# Altium PCB PCB2.PcbDoc
Units mm, origin at the board's own origin, x right, y up, seen from the top; angles counter-clockwise.
Board outline 152.4 x 101.6 mm, 2 copper layers (Top Layer, Bottom Layer); 5 components, 64 nets, 128 pads, 0 vias.
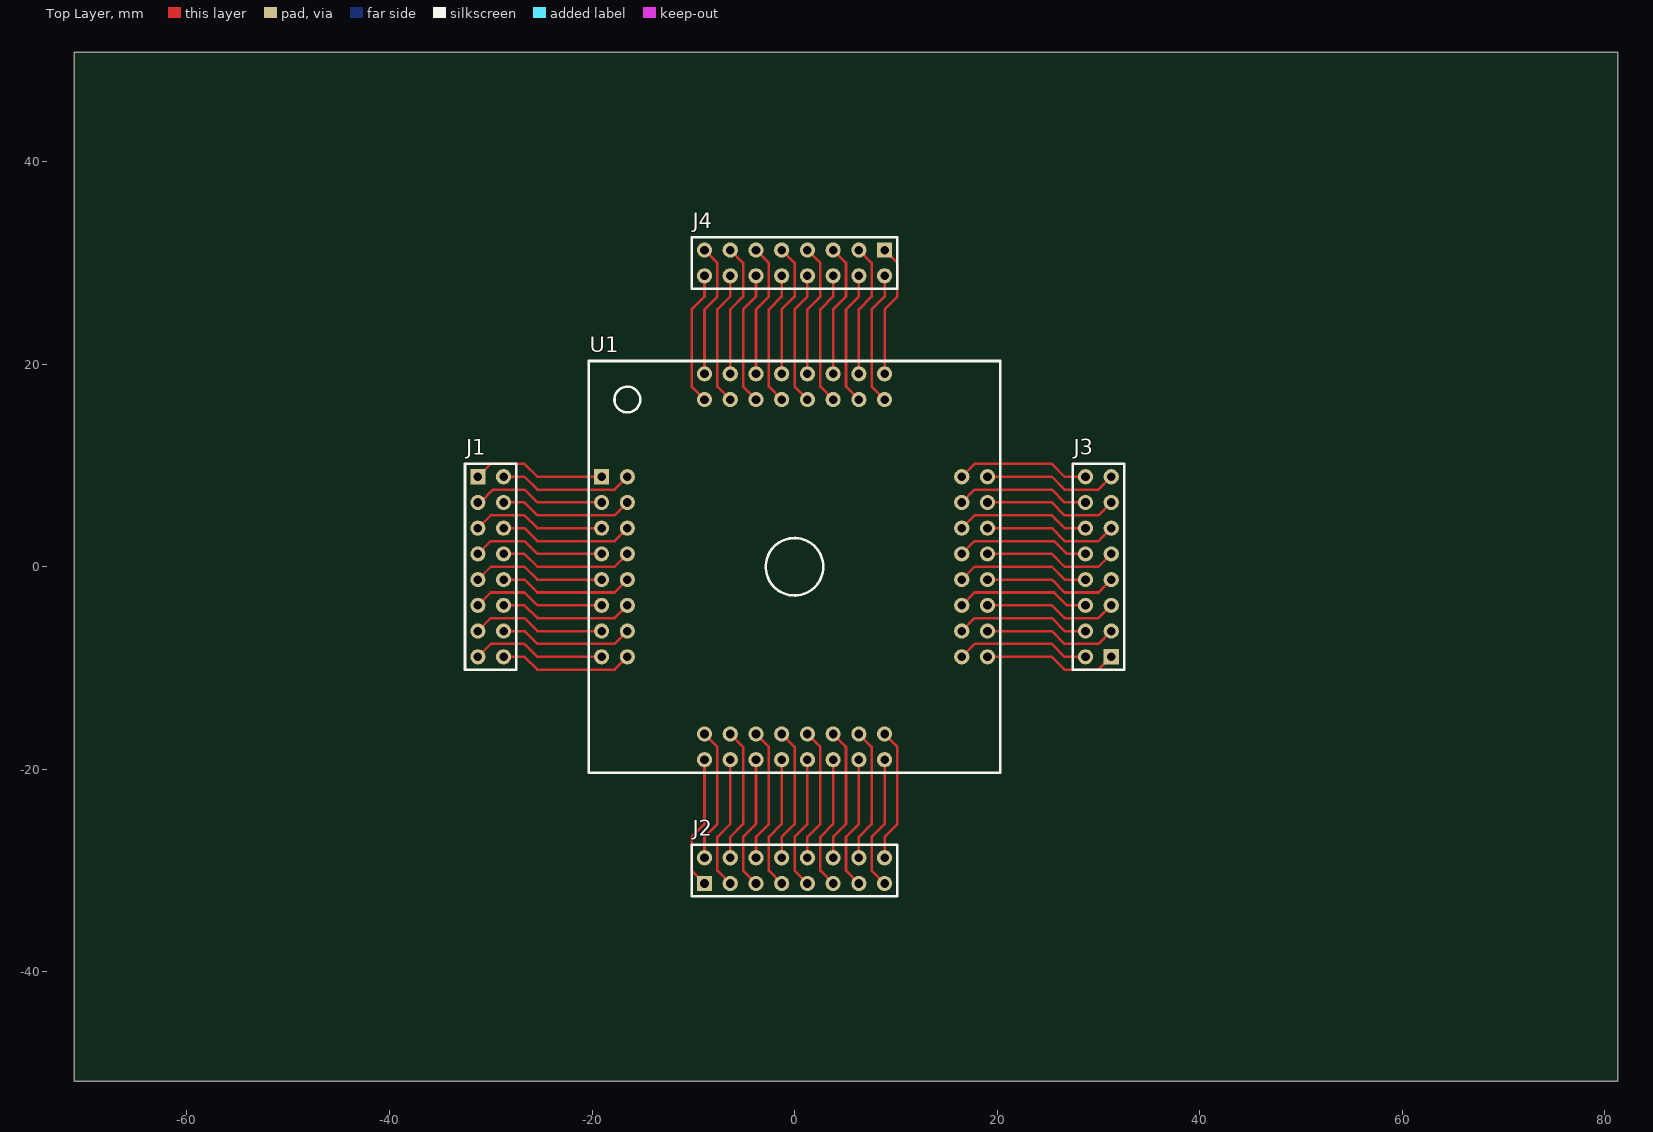
[diagram p0: Top Layer view]
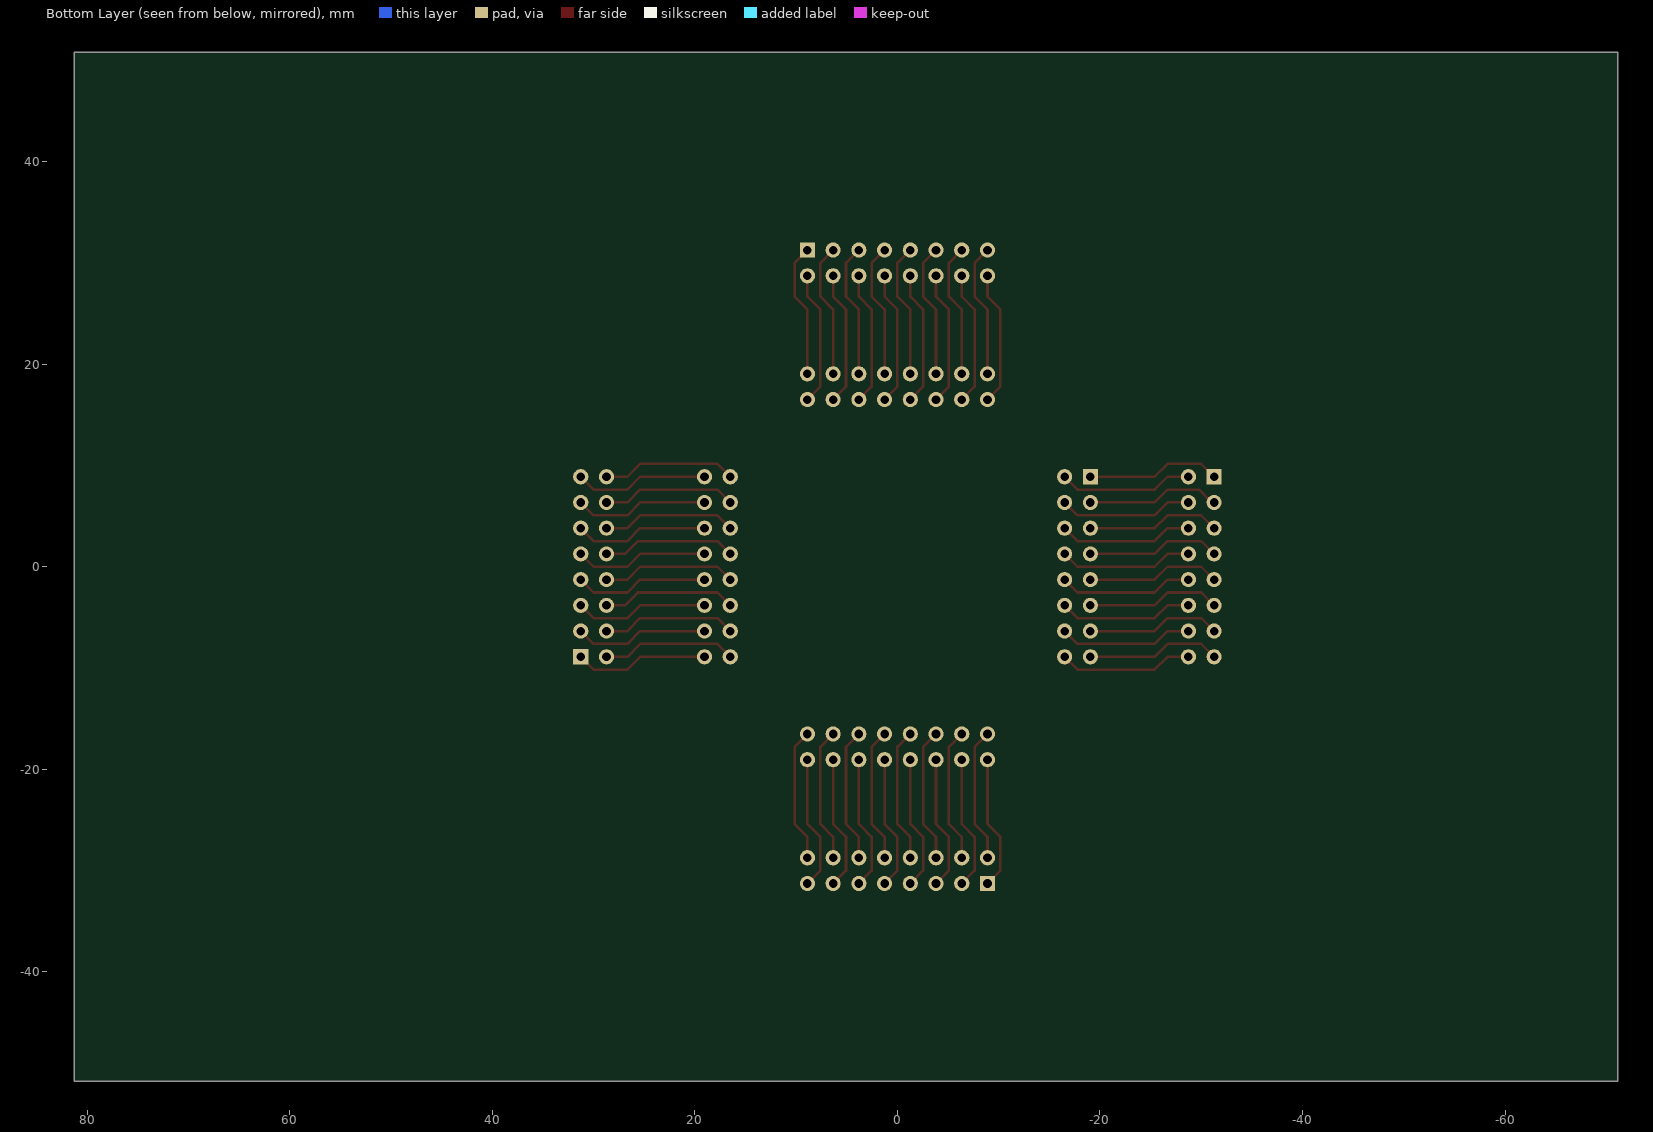
[diagram p1: Bottom Layer view, seen from below]

## Layer stack, top to bottom
Top Solder: solder mask 0.0102, Solder Resist, Dk 3.5
Top Layer: signal copper 0.0356
Dielectric 1: dielectric 0.32, FR-4, Dk 4.8
Bottom Layer: signal copper 0.0356
Bottom Solder: solder mask 0.0102, Solder Resist, Dk 3.5

## Board outline
-71.12,-50.8 81.28,-50.8 81.28,50.8 -71.12,50.8

## Design rules (kind name [scope] priority, off if disabled: settings)
Clearance [All] p1: gap=0.254 ignorepadtopadclearanceinfootprint=FALSE except(0: Arc-Hole Track-Hole SMDPad-Hole THPad-Hole Via-Hole Fill-Hole Poly-Hole Region-Hole Text-Hole)
PolygonConnect [All] p1: connectstyle=Relief reliefconductorwidth=0.254 reliefentries=4 polygonreliefangle="90 Angle" airgapwidth=0.254
RoutingVias [All] p1: holewidth=0.711 width=1.27 viastyle="Through Hole" minholewidth=0.711 minwidth=1.27 maxholewidth=0.711 maxwidth=1.27
SolderMaskExpansion [All] p1: expansion=0.102
Width [All] p1: maxlimit=0.254 minlimit=0.254 preferedwidth=0.254
30 further rules are at their usual default settings.

## Components (designator, comment, footprint, x,y, rotation, side; value= is the part's Value field where it differs from the comment)
J1 "Header 8x2 TH Pitch 2.54mm" "Header 8x2 TH Pitch 2.54mm" -30,0 r0 top
J2 "Header 8x2 TH Pitch 2.54mm" "Header 8x2 TH Pitch 2.54mm" 0,-30 r90 top
J3 "Header 8x2 TH Pitch 2.54mm" "Header 8x2 TH Pitch 2.54mm" 30,0 r180 top
J4 "Header 8x2 TH Pitch 2.54mm" "Header 8x2 TH Pitch 2.54mm" 0,30 r270 top
U1 "TM4C123GH6PMI7" SOCKET-ADAPTER-OTQ-64-05-03 0,0 r0 top

## Footprints (in the part's own frame and the unit in brackets; to place one, negate y for a bottom-side part, rotate by r counter-clockwise, add the part's x,y. Pads: shape width x height; smd on the part's side, far side on the other; paste and mask are expansions set on the pad)
"Header 8x2 TH Pitch 2.54mm" [mm]
  rect 1.5x1.5 hole 0.85: 1(-1.27,8.89)
  round 1.5 hole 0.85: 2(1.27,8.89) 3(-1.27,6.35) 4(1.27,6.35) 5(-1.27,3.81) 6(1.27,3.81) 7(-1.27,1.27) 8(1.27,1.27) 9(-1.27,-1.27) 10(1.27,-1.27) 11(-1.27,-3.81) 12(1.27,-3.81) 13(-1.27,-6.35) 14(1.27,-6.35) 15(-1.27,-8.89) 16(1.27,-8.89)
  silkscreen extent -2.54,-10.16 2.54,10.16, body extent -2.54,-10.16 2.54,10.16, height 8.89
SOCKET-ADAPTER-OTQ-64-05-03 [mm]
  rect 1.5x1.5 hole 0.85: 1(-19.05,8.89)
  round 1.5 hole 0.85: 2(-16.51,8.89) 3(-19.05,6.35) 4(-16.51,6.35) 5(-19.05,3.81) 6(-16.51,3.81) 7(-19.05,1.27) 8(-16.51,1.27) 9(-19.05,-1.27) 10(-16.51,-1.27) 11(-19.05,-3.81) 12(-16.51,-3.81) 13(-19.05,-6.35) 14(-16.51,-6.35) 15(-19.05,-8.89) 16(-16.51,-8.89) 17(-8.89,-19.05) 18(-8.89,-16.51) 19(-6.35,-19.05) 20(-6.35,-16.51) 21(-3.81,-19.05) 22(-3.81,-16.51) 23(-1.27,-19.05) 24(-1.27,-16.51) 25(1.27,-19.05) 26(1.27,-16.51) 27(3.81,-19.05) 28(3.81,-16.51) 29(6.35,-19.05) 30(6.35,-16.51) 31(8.89,-19.05) 32(8.89,-16.51) 33(19.05,-8.89) 34(16.51,-8.89) 35(19.05,-6.35) 36(16.51,-6.35) 37(19.05,-3.81) 38(16.51,-3.81) 39(19.05,-1.27) 40(16.51,-1.27) 41(19.05,1.27) 42(16.51,1.27) 43(19.05,3.81) 44(16.51,3.81) 45(19.05,6.35) 46(16.51,6.35) 47(19.05,8.89) 48(16.51,8.89) 49(8.89,19.05) 50(8.89,16.51) 51(6.35,19.05) 52(6.35,16.51) 53(3.81,19.05) 54(3.81,16.51) 55(1.27,19.05) 56(1.27,16.51) 57(-1.27,19.05) 58(-1.27,16.51) 59(-3.81,19.05) 60(-3.81,16.51) 61(-6.35,19.05) 62(-6.35,16.51) 63(-8.89,19.05) 64(-8.89,16.51)
  silkscreen extent -20.32,-20.32 20.32,20.32, body extent -20.32,-20.32 20.32,20.32, height 9.5

## Nets (pads, with @x,y where several pads share a name; then routed paths per layer and width w, separated by ;. In a path a pad name is that pad's centre, name@x,y a point inside that pad or via, vN(x,y) a via of type N, cw(c..) or ccw(c..) an arc to the next point about the centre after c; other vN are vias at no path point)
PIN1: J1.1 U1.1 | length 13.3
  Top Layer w0.254: J1.1 -30,10.16 -26.67,10.16 -25.4,8.89 U1.1
PIN2: J1.2 U1.2 | length 13.3
  Top Layer w0.254: J1.2 -26.67,8.89 -25.4,7.62 -17.78,7.62 U1.2
PIN3: J1.3 U1.3 | length 13.3
  Top Layer w0.254: J1.3 -31.032,6.35 -29.762,7.62 -26.67,7.62 -25.4,6.35 U1.3
PIN4: J1.4 U1.4 | length 13.3
  Top Layer w0.254: J1.4 -26.67,6.35 -25.4,5.08 -17.78,5.08 U1.4
PIN5: J1.5 U1.5 | length 13.3
  Top Layer w0.254: J1.5 -30,5.08 -26.67,5.08 -25.4,3.81 U1.5
PIN6: J1.6 U1.6 | length 13.3
  Top Layer w0.254: J1.6 -26.67,3.81 -25.4,2.54 -17.78,2.54 U1.6
PIN7: J1.7 U1.7 | length 13.3
  Top Layer w0.254: J1.7 -30,2.54 -26.67,2.54 -25.4,1.27 U1.7
PIN8: J1.8 U1.8 | length 13.3
  Top Layer w0.254: J1.8 -26.67,1.27 -25.4,0 -17.78,0 U1.8
PIN9: J1.9 U1.9 | length 13.3
  Top Layer w0.254: J1.9 -30,0 -26.67,0 -25.4,-1.27 U1.9
PIN10: J1.10 U1.10 | length 13.3
  Top Layer w0.254: J1.10 -26.67,-1.27 -25.4,-2.54 -17.78,-2.54 U1.10
PIN11: J1.11 U1.11 | length 13.3
  Top Layer w0.254: J1.11 -30,-2.54 -26.67,-2.54 -25.4,-3.81 U1.11
PIN12: J1.12 U1.12 | length 13.3
  Top Layer w0.254: J1.12 -26.67,-3.81 -25.4,-5.08 -17.78,-5.08 U1.12
PIN13: J1.13 U1.13 | length 13.3
  Top Layer w0.254: J1.13 -30,-5.08 -26.67,-5.08 -25.4,-6.35 U1.13
PIN14: J1.14 U1.14 | length 13.3
  Top Layer w0.254: J1.14 -26.67,-6.35 -25.4,-7.62 -17.78,-7.62 U1.14
PIN15: J1.15 U1.15 | length 13.3
  Top Layer w0.254: J1.15 -30,-7.62 -26.67,-7.62 -25.4,-8.89 U1.15
PIN16: J1.16 U1.16 | length 13.3
  Top Layer w0.254: J1.16 -26.67,-8.89 -25.4,-10.16 -17.78,-10.16 U1.16
PIN17: J2.1 U1.17 | length 13.3
  Top Layer w0.254: J2.1 -10.16,-30 -10.16,-26.67 -8.89,-25.4 U1.17
PIN18: J2.2 U1.18 | length 13.3
  Top Layer w0.254: J2.2 -8.89,-26.67 -7.62,-25.4 -7.62,-17.78 U1.18
PIN19: J2.3 U1.19 | length 13.3
  Top Layer w0.254: J2.3 -7.62,-30 -7.62,-26.67 -6.35,-25.4 U1.19
PIN20: J2.4 U1.20 | length 13.3
  Top Layer w0.254: J2.4 -6.35,-26.67 -5.08,-25.4 -5.08,-17.78 U1.20
PIN21: J2.5 U1.21 | length 13.3
  Top Layer w0.254: J2.5 -5.08,-30 -5.08,-26.67 -3.81,-25.4 U1.21
PIN22: J2.6 U1.22 | length 13.3
  Top Layer w0.254: J2.6 -3.81,-26.67 -2.54,-25.4 -2.54,-17.78 U1.22
PIN23: J2.7 U1.23 | length 13.3
  Top Layer w0.254: J2.7 -2.54,-30 -2.54,-26.67 -1.27,-25.4 U1.23
PIN24: J2.8 U1.24 | length 13.3
  Top Layer w0.254: J2.8 -1.27,-26.67 0,-25.4 0,-17.78 U1.24
PIN25: J2.9 U1.25 | length 13.3
  Top Layer w0.254: J2.9 0,-30 0,-26.67 1.27,-25.4 U1.25
PIN26: J2.10 U1.26 | length 13.3
  Top Layer w0.254: J2.10 1.27,-26.67 2.54,-25.4 2.54,-17.78 U1.26
PIN27: J2.11 U1.27 | length 13.3
  Top Layer w0.254: J2.11 2.54,-30 2.54,-26.67 3.81,-25.4 U1.27
PIN28: J2.12 U1.28 | length 13.3
  Top Layer w0.254: J2.12 3.81,-26.67 5.08,-25.4 5.08,-17.78 U1.28
PIN29: J2.13 U1.29 | length 13.3
  Top Layer w0.254: J2.13 5.08,-30 5.08,-26.67 6.35,-25.4 U1.29
PIN30: J2.14 U1.30 | length 13.3
  Top Layer w0.254: J2.14 6.35,-26.67 7.62,-25.4 7.62,-17.78 U1.30
PIN31: J2.15 U1.31 | length 13.3
  Top Layer w0.254: J2.15 7.62,-30 7.62,-26.67 8.89,-25.4 U1.31
PIN32: J2.16 U1.32 | length 13.3
  Top Layer w0.254: J2.16 8.89,-26.67 10.16,-25.4 10.16,-17.78 U1.32
PIN33: J3.1 U1.33 | length 13.3
  Top Layer w0.254: U1.33 25.4,-8.89 26.67,-10.16 30,-10.16 J3.1
PIN34: J3.2 U1.34 | length 13.3
  Top Layer w0.254: U1.34 17.78,-7.62 25.4,-7.62 26.67,-8.89 J3.2
PIN35: J3.3 U1.35 | length 13.3
  Top Layer w0.254: U1.35 25.4,-6.35 26.67,-7.62 30,-7.62 J3.3
PIN36: J3.4 U1.36 | length 13.3
  Top Layer w0.254: U1.36 17.78,-5.08 25.4,-5.08 26.67,-6.35 J3.4
PIN37: J3.5 U1.37 | length 13.3
  Top Layer w0.254: U1.37 25.4,-3.81 26.67,-5.08 30,-5.08 J3.5
PIN38: J3.6 U1.38 | length 13.3
  Top Layer w0.254: U1.38 17.78,-2.54 25.626,-2.54 26.896,-3.81 J3.6
PIN39: J3.7 U1.39 | length 13.3
  Top Layer w0.254: U1.39 25.4,-1.27 26.67,-2.54 30,-2.54 J3.7
PIN40: J3.8 U1.40 | length 13.3
  Top Layer w0.254: U1.40 17.78,0 25.4,0 26.67,-1.27 J3.8
PIN41: J3.9 U1.41 | length 13.3
  Top Layer w0.254: U1.41 25.4,1.27 26.67,0 30,0 J3.9
PIN42: J3.10 U1.42 | length 13.3
  Top Layer w0.254: U1.42 17.78,2.54 25.626,2.54 26.896,1.27 J3.10
PIN43: J3.11 U1.43 | length 13.3
  Top Layer w0.254: U1.43 25.4,3.81 26.67,2.54 30,2.54 J3.11
PIN44: J3.12 U1.44 | length 13.3
  Top Layer w0.254: U1.44 17.78,5.08 25.4,5.08 26.67,3.81 J3.12
PIN45: J3.13 U1.45 | length 13.3
  Top Layer w0.254: U1.45 25.4,6.35 26.67,5.08 30,5.08 J3.13
PIN46: J3.14 U1.46 | length 13.3
  Top Layer w0.254: U1.46 17.78,7.62 25.4,7.62 26.67,6.35 J3.14
PIN47: J3.15 U1.47 | length 13.3
  Top Layer w0.254: U1.47 25.4,8.89 26.67,7.62 30,7.62 J3.15
PIN48: J3.16 U1.48 | length 13.3
  Top Layer w0.254: U1.48 17.78,10.16 25.4,10.16 26.67,8.89 J3.16
PIN49: J4.1 U1.49 | length 13.3
  Top Layer w0.254: U1.49 8.89,25.4 10.16,26.67 10.16,30 J4.1
PIN50: J4.2 U1.50 | length 13.3
  Top Layer w0.254: U1.50 7.62,17.78 7.62,25.4 8.89,26.67 J4.2
PIN51: J4.3 U1.51 | length 13.3
  Top Layer w0.254: U1.51 6.35,25.4 7.62,26.67 7.62,30 J4.3
PIN52: J4.4 U1.52 | length 13.3
  Top Layer w0.254: U1.52 5.08,17.78 5.08,25.4 6.35,26.67 J4.4
PIN53: J4.5 U1.53 | length 13.3
  Top Layer w0.254: U1.53 3.81,25.4 5.08,26.67 5.08,30 J4.5
PIN54: J4.6 U1.54 | length 13.3
  Top Layer w0.254: U1.54 2.54,17.78 2.54,25.4 3.81,26.67 J4.6
PIN55: J4.7 U1.55 | length 13.3
  Top Layer w0.254: U1.55 1.27,25.4 2.54,26.67 2.54,30 J4.7
PIN56: J4.8 U1.56 | length 13.3
  Top Layer w0.254: U1.56 0,17.78 0,25.4 1.27,26.67 J4.8
PIN57: J4.9 U1.57 | length 13.3
  Top Layer w0.254: U1.57 -1.27,25.4 0,26.67 0,30 J4.9
PIN58: J4.10 U1.58 | length 13.3
  Top Layer w0.254: U1.58 -2.54,17.78 -2.54,25.4 -1.27,26.67 J4.10
PIN59: J4.11 U1.59 | length 13.3
  Top Layer w0.254: U1.59 -3.81,25.4 -2.54,26.67 -2.54,30 J4.11
PIN60: J4.12 U1.60 | length 13.3
  Top Layer w0.254: U1.60 -5.08,17.78 -5.08,25.4 -3.81,26.67 J4.12
PIN61: J4.13 U1.61 | length 13.3
  Top Layer w0.254: U1.61 -6.35,25.4 -5.08,26.67 -5.08,30 J4.13
PIN62: J4.14 U1.62 | length 13.3
  Top Layer w0.254: U1.62 -7.62,17.78 -7.62,25.4 -6.35,26.67 J4.14
PIN63: J4.15 U1.63 | length 13.3
  Top Layer w0.254: U1.63 -8.89,25.4 -7.62,26.67 -7.62,30 J4.15
PIN64: J4.16 U1.64 | length 13.3
  Top Layer w0.254: U1.64 -10.16,17.78 -10.16,25.4 -8.89,26.67 J4.16